# EAGLE board Protoboard-01 (EAGLE 5.06), part 1 of 2
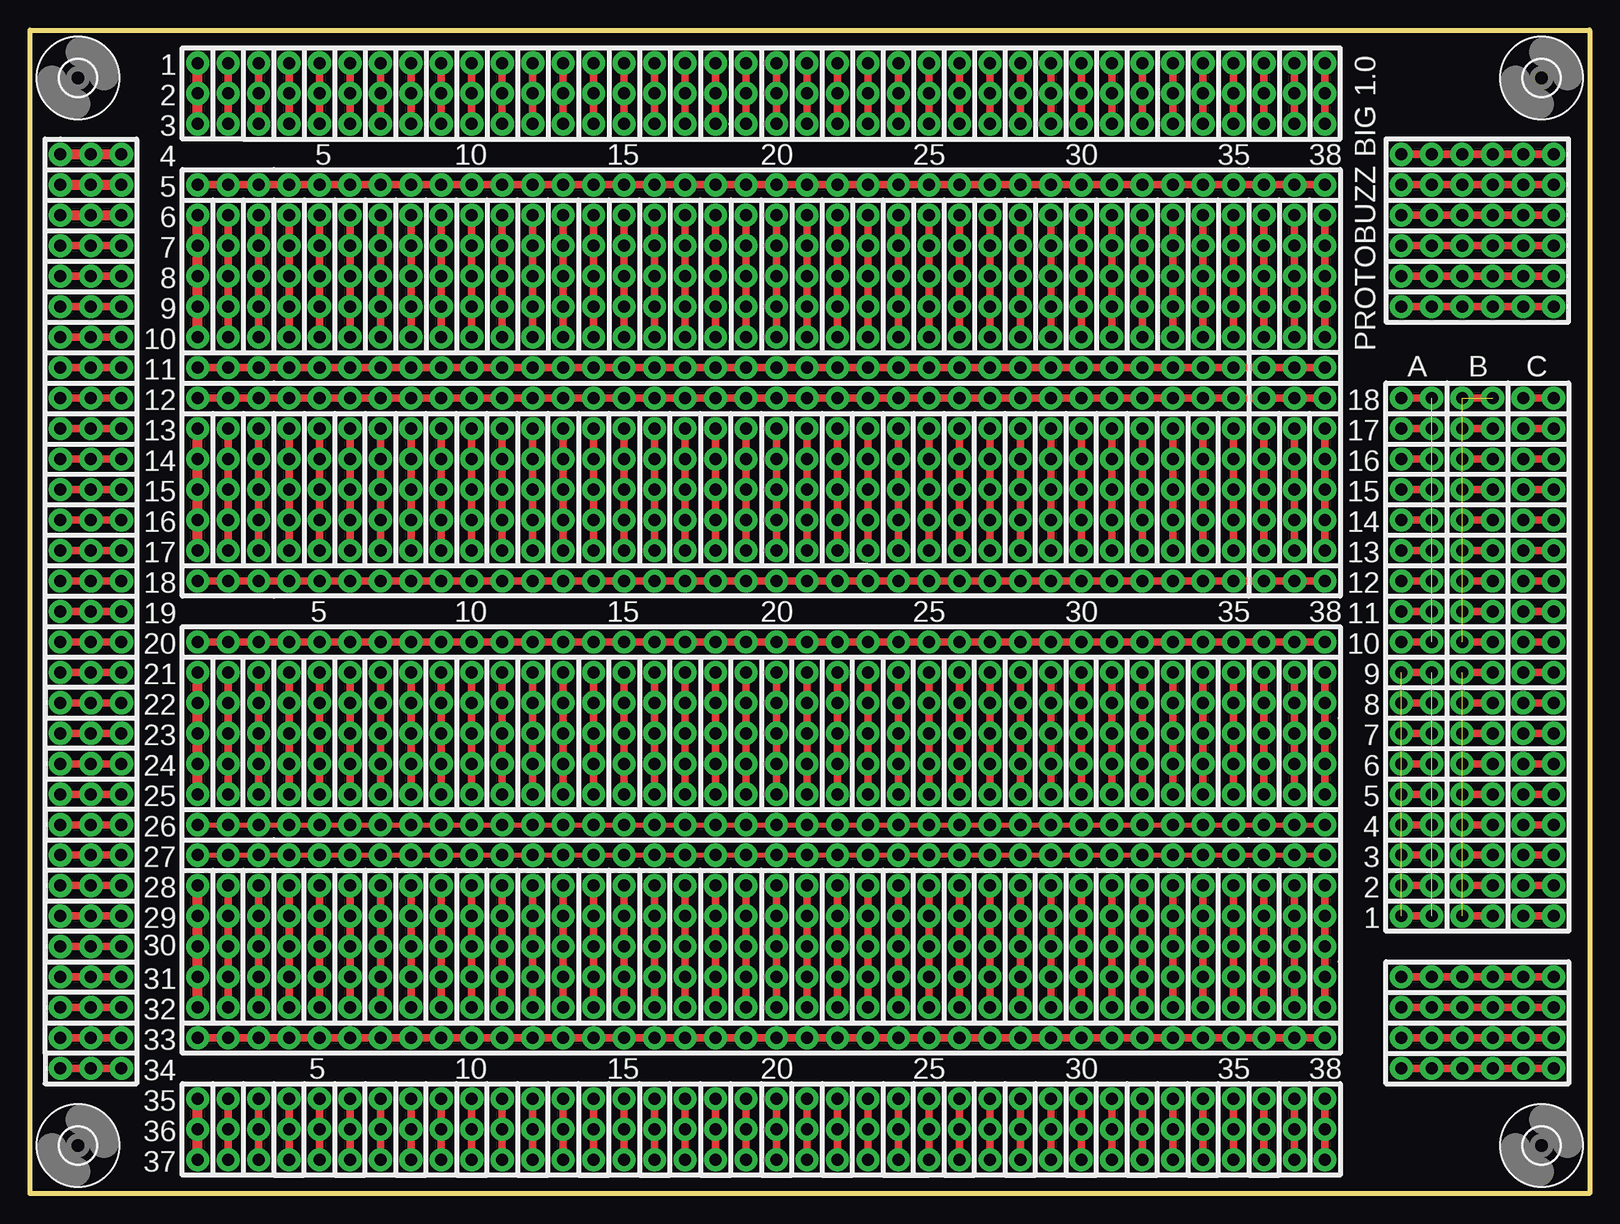
[diagram p0: board, top side]
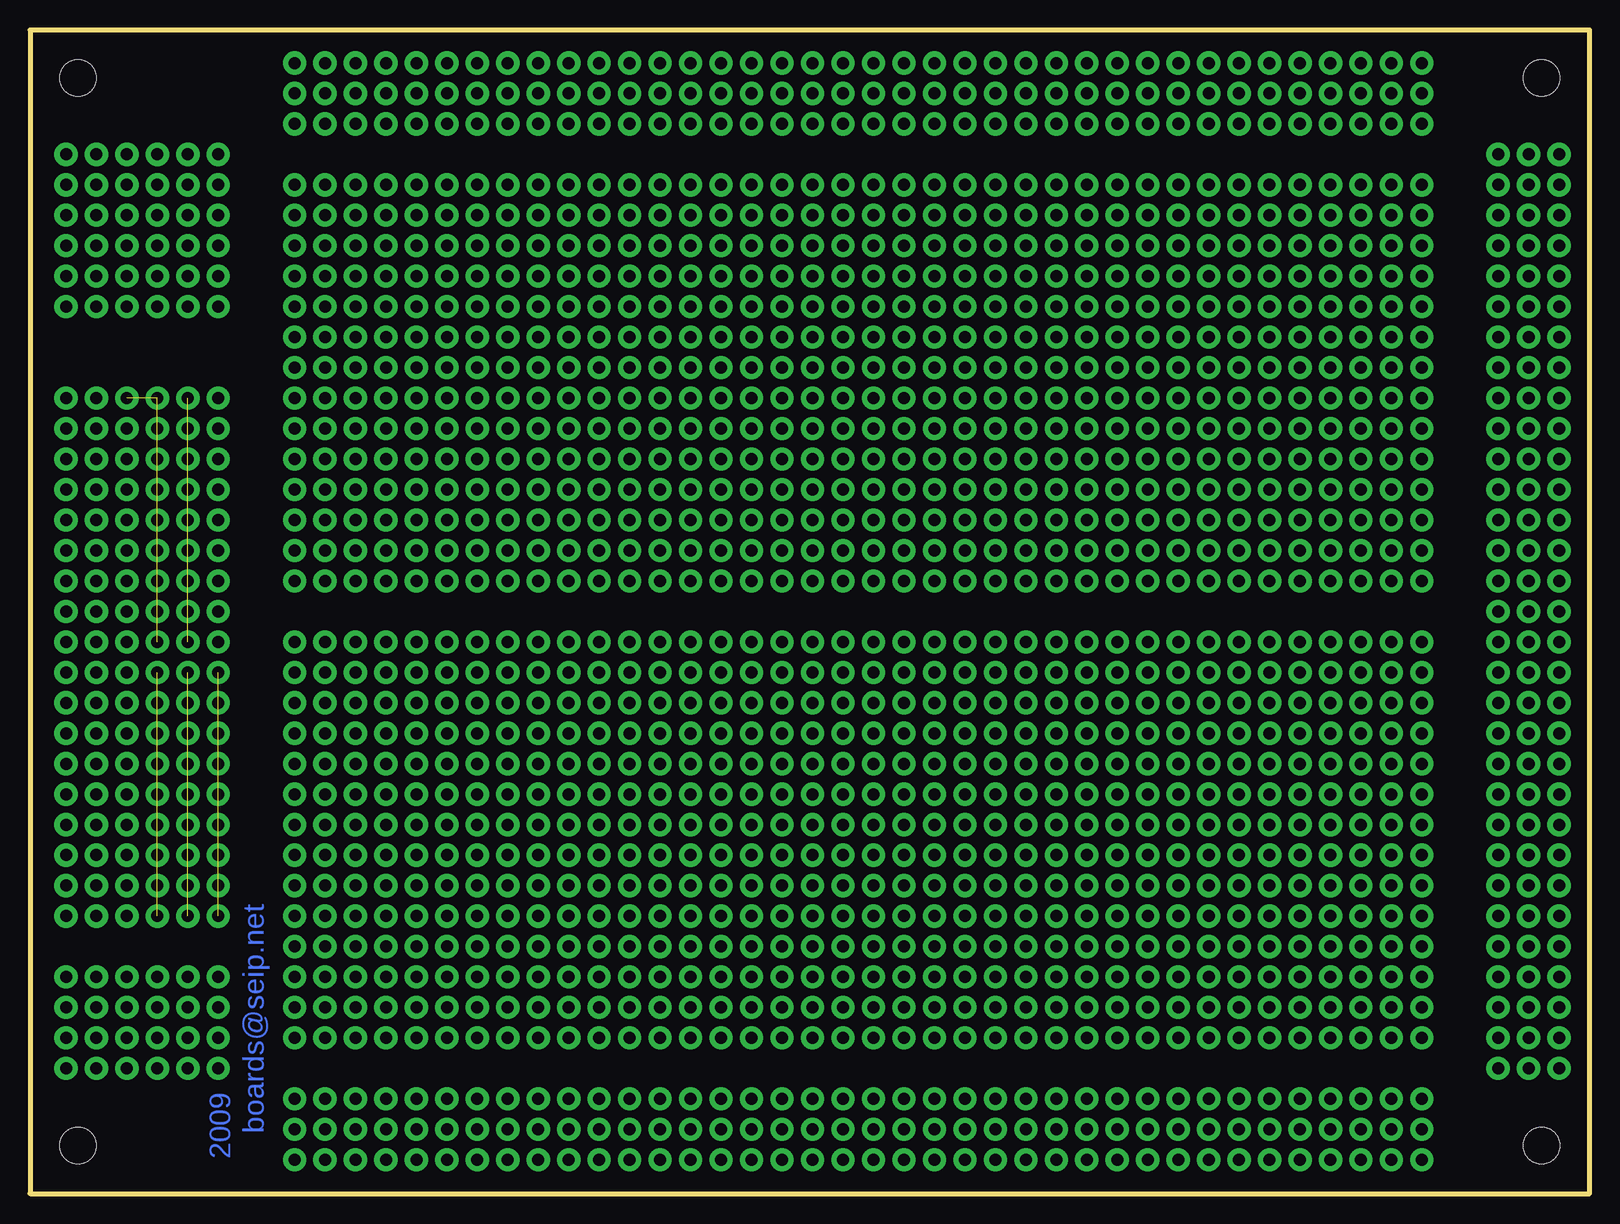
[diagram p1: board, bottom side, seen from below]

Size 130 x 97 mm. Coordinates in mm from the lower left corner, seen from the top.
Outline: 0,0 0,97 130,97 130,0 0,0
Copper layers (1*16): Top 0.035mm / dielectric 1.5mm / Bottom 0.035mm
Design rules "PCB-POOL": minimum track width 6mil, minimum drill 12mil, track to track 6mil, track to pad 6mil, pad to pad 6mil, via to via 6mil, smd to smd 6mil, copper to edge 20mil, drill to drill 8mil, minimum pad ring 8mil, minimum via ring 6mil, stop-mask expansion 3mil, vias tented up to drill 0mil, thermal gap 8mil

## Footprints (pad centres in the part's own frame; a part is rotated, then mirrored left to right if it is on the bottom)
3,0 = hole 3: 0,0

## Placement (x,y rotation side)
E$1  [3,0]  4,93 0 top
E$2  [3,0]  126,93 0 top
E$3  [3,0]  126,4 0 top
E$4  [3,0]  4,4 0 top

## Library data of the parts
E$1-E$4 = holes

## Tracks (layer width: path | path; a pad name or v marks a point on that pad's centre or on a via)
S$1  (via drill 1 pad 1.93)
  Top 0.61: v2.54,10.43 v7.62,10.43
S$2  (via drill 1 pad 1.93)
  Top 0.406: v13.97,30.75 v100.33,30.75
S$3  (via drill 1 pad 1.93)
  other vias: 5.08,10.43
S$5  (via drill 1 pad 1.93)
  Top 0.61: v114.3,10.43 v127,10.43
S$6  (via drill 1 pad 1.93)
  other vias: 116.84,10.43
S$7  (via drill 1 pad 1.93)
  other vias: 119.38,10.43
S$8  (via drill 1 pad 1.93)  (8 unrouted)
  Top 0.61: v119.38,23.13 v121.92,23.13 | v119.38,43.45 v121.92,43.45 | v119.38,40.91 v121.92,40.91 | v119.38,38.37 v121.92,38.37 | v119.38,35.83 v121.92,35.83 | v119.38,33.29 v121.92,33.29 | v119.38,30.75 v121.92,30.75 | v119.38,28.21 v121.92,28.21 | v119.38,25.67 v121.92,25.67
S$9  (via drill 1 pad 1.93)
  Top 0.406: v13.97,28.21 v100.33,28.21
S$10  (via drill 1 pad 1.93)
  Top 0.61: v114.3,86.63 v127,86.63
S$11  (via drill 1 pad 1.93)
  Top 0.61: v13.97,66.31 v100.33,66.31
S$12  (via drill 1 pad 1.93)
  Top 0.813: v13.97,53.61 v13.97,63.77
S$13  (via drill 1 pad 1.93)
  other vias: 116.84,86.63
S$14  (via drill 1 pad 1.93)
  other vias: 116.84,84.09
S$15  (via drill 1 pad 1.93)
  Top 0.61: v114.3,84.09 v127,84.09
S$16  (via drill 1 pad 1.93)
  Top 0.61: v114.3,81.55 v127,81.55
S$17  (via drill 1 pad 1.93)
  Top 0.61: v114.3,76.47 v127,76.47
S$18  (via drill 1 pad 1.93)
  other vias: 116.84,81.55
S$19  (via drill 1 pad 1.93)
  other vias: 116.84,76.47
S$20  (via drill 1 pad 1.93)
  other vias: 119.38,86.63
S$21  (via drill 1 pad 1.93)
  other vias: 119.38,84.09
S$22  (via drill 1 pad 1.93)
  other vias: 119.38,81.55
S$23  (via drill 1 pad 1.93)
  Top 0.61: v13.97,45.99 v100.33,45.99
S$24  (via drill 1 pad 1.93)
  other vias: 119.38,76.47
S$25  (via drill 1 pad 1.93)
  Top 0.61: v114.3,79.01 v127,79.01
S$26  (via drill 1 pad 1.93)
  other vias: 116.84,79.01
S$27  (via drill 1 pad 1.93)
  other vias: 105.41,18.05
S$29  (via drill 1 pad 1.93)
  other vias: 105.41,12.97
S$30  (via drill 1 pad 1.93)  (8 unrouted)
  Top 0.61: v114.3,66.31 v116.84,66.31 | v114.3,63.77 v116.84,63.77 | v114.3,61.23 v116.84,61.23 | v114.3,58.69 v116.84,58.69 | v114.3,56.15 v116.84,56.15 | v114.3,53.61 v116.84,53.61 | v114.3,51.07 v116.84,51.07 | v114.3,48.53 v116.84,48.53 | v114.3,45.99 v116.84,45.99
S$31  (via drill 1 pad 1.93)  (16 unrouted)
  Top 0.406: v114.3,43.45 v116.84,43.45
  Top 0.61: v114.3,23.13 v116.84,23.13 | v114.3,43.45 v116.84,43.45 | v114.3,40.91 v116.84,40.91 | v114.3,38.37 v116.84,38.37 | v114.3,35.83 v116.84,35.83 | v114.3,33.29 v116.84,33.29 | v114.3,30.75 v116.84,30.75 | v114.3,28.21 v116.84,28.21 | v114.3,25.67 v116.84,25.67
S$32  (via drill 1 pad 1.93)
  other vias: 119.38,79.01
S$36  (via drill 1 pad 1.93)
  Top 0.61: v114.3,73.93 v127,73.93
S$37  (via drill 1 pad 1.93)
  Top 0.61: v105.41,7.89 v105.41,2.81
S$38  (via drill 1 pad 1.93)
  other vias: 105.41,5.35
S$39  (via drill 1 pad 1.93)
  other vias: 116.84,73.93
S$40  (via drill 1 pad 1.93)
  other vias: 119.38,73.93
S$41  (via drill 1 pad 1.93)
  Top 0.61: 21.59,84.09 v107.95,84.09
S$42  (via drill 1 pad 1.93)
  other vias: 105.41,84.09
S$43  (via drill 1 pad 1.93)
  other vias: 102.87,84.09
S$44  (via drill 1 pad 1.93)
  Top 0.61: v13.97,12.97 v107.95,12.97
S$45  (via drill 1 pad 1.93)
  Top 0.61: v13.97,84.09 v100.33,84.09
S$46  (via drill 1 pad 1.93)
  other vias: 102.87,79.01
S$47  (via drill 1 pad 1.93)
  other vias: 102.87,76.47
S$48  (via drill 1 pad 1.93)
  other vias: 102.87,73.93
S$50  (via drill 1 pad 1.93)
  other vias: 107.95,18.05
S$52  (via drill 1 pad 1.93)
  Top 0.61: v107.95,7.89 v107.95,2.81
S$53  (via drill 1 pad 1.93)
  Top 0.813: v2.54,84.09 v7.62,84.09
S$54  (via drill 1 pad 1.93)
  other vias: 5.08,84.09
S$55  (via drill 1 pad 1.93)
  other vias: 107.95,5.35
S$56  (via drill 1 pad 1.93)
  Top 0.813: v2.54,81.55 v7.62,81.55
S$57  (via drill 1 pad 1.93)
  other vias: 5.08,81.55
S$59  (via drill 1 pad 1.93)
  Top 0.61: v2.54,79.01 v7.62,79.01
S$60  (via drill 1 pad 1.93)
  other vias: 5.08,79.01
S$62  (via drill 1 pad 1.93)
  Top 0.61: v102.87,81.55 v102.87,71.39
S$63  (via drill 1 pad 1.93)
  Top 0.61: v105.41,81.55 v105.41,71.39
S$66  (via drill 1 pad 1.93)
  other vias: 102.87,91.71
S$67  (via drill 1 pad 1.93)
  Top 0.61: v102.87,94.25 v102.87,89.17
S$68  (via drill 1 pad 1.93)
  Top 0.61: v105.41,94.25 v105.41,89.17
S$69  (via drill 1 pad 1.93)
  other vias: 105.41,91.71
S$71  (via drill 1 pad 1.93)
  other vias: 105.41,79.01
S$72  (via drill 1 pad 1.93)
  other vias: 105.41,76.47
S$73  (via drill 1 pad 1.93)
  other vias: 105.41,73.93
S$75  (via drill 1 pad 1.93)
  Top 0.61: v107.95,94.25 v107.95,89.17
S$76  (via drill 1 pad 1.93)
  other vias: 107.95,91.71
S$78  (via drill 1 pad 1.93)
  other vias: 107.95,79.01
S$79  (via drill 1 pad 1.93)
  other vias: 107.95,76.47
S$80  (via drill 1 pad 1.93)
  other vias: 107.95,73.93
S$82  (via drill 1 pad 1.93)
  Top 0.61: v107.95,81.55 v107.95,71.39
S$83  (via drill 1 pad 1.93)
  Top 0.61: 21.59,66.31 v107.95,66.31
S$84  (via drill 1 pad 1.93)
  Top 0.61: 21.59,45.99 v107.95,45.99
S$85  (via drill 1 pad 1.93)
  Top 0.61: 21.59,68.85 v107.95,68.85
S$86  (via drill 1 pad 1.93)
  Top 0.61: 21.59,51.07 v107.95,51.07
S$87  (via drill 1 pad 1.93)
  other vias: 102.87,66.31
S$88  (via drill 1 pad 1.93)
  other vias: 105.41,66.31
S$89  (via drill 1 pad 1.93)
  Top 0.61: v105.41,63.77 v105.41,53.61
S$90  (via drill 1 pad 1.93)
  Top 0.61: v102.87,63.77 v102.87,53.61
S$91  (via drill 1 pad 1.93)
  Top 0.813: v13.97,71.39 v13.97,81.55
S$92  (via drill 1 pad 1.93)
  other vias: 105.41,45.99
S$93  (via drill 1 pad 1.93)
  other vias: 102.87,45.99
S$94  (via drill 1 pad 1.93)
  other vias: 102.87,30.75
S$95  (via drill 1 pad 1.93)
  Top 0.61: v2.54,76.47 v7.62,76.47
S$96  (via drill 1 pad 1.93)
  other vias: 5.08,76.47
S$99  (via drill 1 pad 1.93)
  other vias: 5.08,73.93
S$100  (via drill 1 pad 1.93)
  Top 0.61: v2.54,73.93 v7.62,73.93
S$101  (via drill 1 pad 1.93)
  Top 0.61: v2.54,71.39 v7.62,71.39
S$102  (via drill 1 pad 1.93)
  other vias: 5.08,71.39
S$104  (via drill 1 pad 1.93)
  Top 0.61: v2.54,68.85 v7.62,68.85
S$105  (via drill 1 pad 1.93)
  other vias: 5.08,68.85
S$108  (via drill 1 pad 1.93)
  other vias: 5.08,66.31
S$109  (via drill 1 pad 1.93)
  Top 0.61: v2.54,66.31 v7.62,66.31
S$110  (via drill 1 pad 1.93)
  Top 0.61: v2.54,63.77 v7.62,63.77
S$111  (via drill 1 pad 1.93)
  other vias: 5.08,63.77
S$114  (via drill 1 pad 1.93)
  other vias: 5.08,61.23
S$115  (via drill 1 pad 1.93)
  Top 0.61: v2.54,61.23 v7.62,61.23
S$116  (via drill 1 pad 1.93)
  Top 0.61: v2.54,58.69 v7.62,58.69
S$117  (via drill 1 pad 1.93)
  other vias: 5.08,58.69
S$120  (via drill 1 pad 1.93)
  other vias: 5.08,56.15
S$121  (via drill 1 pad 1.93)
  Top 0.61: v2.54,56.15 v7.62,56.15
S$122  (via drill 1 pad 1.93)
  Top 0.61: v2.54,53.61 v7.62,53.61
S$123  (via drill 1 pad 1.93)
  other vias: 5.08,53.61
S$126  (via drill 1 pad 1.93)
  other vias: 5.08,51.07
S$127  (via drill 1 pad 1.93)
  Top 0.61: v2.54,51.07 v7.62,51.07
S$128  (via drill 1 pad 1.93)
  Top 0.61: v2.54,48.53 v7.62,48.53
S$129  (via drill 1 pad 1.93)
  other vias: 5.08,48.53
S$132  (via drill 1 pad 1.93)
  other vias: 5.08,45.99
S$133  (via drill 1 pad 1.93)
  Top 0.61: v2.54,45.99 v7.62,45.99
S$134  (via drill 1 pad 1.93)
  Top 0.61: v2.54,43.45 v7.62,43.45
S$135  (via drill 1 pad 1.93)
  other vias: 5.08,43.45
S$138  (via drill 1 pad 1.93)
  other vias: 5.08,40.91
S$139  (via drill 1 pad 1.93)
  Top 0.61: v2.54,40.91 v7.62,40.91
S$140  (via drill 1 pad 1.93)
  Top 0.61: v2.54,38.37 v7.62,38.37
S$141  (via drill 1 pad 1.93)
  other vias: 5.08,38.37
S$144  (via drill 1 pad 1.93)
  other vias: 5.08,35.83
S$145  (via drill 1 pad 1.93)
  Top 0.61: v2.54,35.83 v7.62,35.83
S$146  (via drill 1 pad 1.93)
  Top 0.61: v2.54,33.29 v7.62,33.29
S$147  (via drill 1 pad 1.93)
  other vias: 5.08,33.29
S$150  (via drill 1 pad 1.93)
  other vias: 5.08,30.75
S$151  (via drill 1 pad 1.93)
  Top 0.61: v2.54,30.75 v7.62,30.75
S$152  (via drill 1 pad 1.93)
  Top 0.61: v2.54,28.21 v7.62,28.21
S$153  (via drill 1 pad 1.93)
  other vias: 5.08,28.21
S$156  (via drill 1 pad 1.93)
  other vias: 5.08,25.67
S$157  (via drill 1 pad 1.93)
  Top 0.61: v2.54,25.67 v7.62,25.67
S$158  (via drill 1 pad 1.93)
  Top 0.61: v2.54,23.13 v7.62,23.13
S$159  (via drill 1 pad 1.93)
  other vias: 5.08,23.13
S$161  (via drill 1 pad 1.93)
  Top 0.61: v2.54,20.59 v7.62,20.59
S$162  (via drill 1 pad 1.93)
  other vias: 5.08,20.59
S$165  (via drill 1 pad 1.93)
  other vias: 5.08,18.05
S$166  (via drill 1 pad 1.93)
  Top 0.61: v2.54,18.05 v7.62,18.05
S$167  (via drill 1 pad 1.93)
  Top 0.61: v2.54,15.51 v7.62,15.51
S$168  (via drill 1 pad 1.93)
  other vias: 5.08,15.51
S$171  (via drill 1 pad 1.93)
  other vias: 5.08,12.97
S$172  (via drill 1 pad 1.93)
  Top 0.61: v2.54,12.97 v7.62,12.97
S$173  (via drill 1 pad 1.93)
  other vias: 105.41,30.75
S$174  (via drill 1 pad 1.93)
  other vias: 105.41,28.21
S$175  (via drill 1 pad 1.93)
  other vias: 102.87,28.21
S$176  (via drill 1 pad 1.93)
  other vias: 102.87,68.85
S$177  (via drill 1 pad 1.93)
  other vias: 102.87,61.23
S$178  (via drill 1 pad 1.93)
  other vias: 102.87,58.69
S$182  (via drill 1 pad 1.93)
  Top 0.813: v2.54,86.63 v7.62,86.63
S$183  (via drill 1 pad 1.93)
  other vias: 5.08,86.63
S$184  (via drill 1 pad 1.93)
  other vias: 102.87,56.15
S$185  (via drill 1 pad 1.93)
  Top 0.813: v13.97,89.17 v13.97,94.25
S$186  (via drill 1 pad 1.93)
  other vias: 13.97,91.71
S$188  (via drill 1 pad 1.93)
  other vias: 13.97,79.01
S$189  (via drill 1 pad 1.93)
  other vias: 13.97,76.47
S$190  (via drill 1 pad 1.93)
  other vias: 13.97,73.93
S$191  (via drill 1 pad 1.93)
  other vias: 102.87,51.07
S$192  (via drill 1 pad 1.93)
  Top 0.61: v13.97,68.85 v100.33,68.85
S$193  (via drill 1 pad 1.93)
  other vias: 13.97,61.23
S$194  (via drill 1 pad 1.93)
  other vias: 13.97,58.69
S$195  (via drill 1 pad 1.93)
  other vias: 13.97,56.15
S$196  (via drill 1 pad 1.93)
  Top 0.61: v102.87,43.45 v102.87,33.29
S$197  (via drill 1 pad 1.93)
  Top 0.61: v13.97,51.07 v100.33,51.07
S$198  (via drill 1 pad 1.93)
  Top 0.813: v13.97,33.29 v13.97,43.45
S$199  (via drill 1 pad 1.93)
  other vias: 13.97,40.91
S$200  (via drill 1 pad 1.93)
  other vias: 13.97,38.37
S$201  (via drill 1 pad 1.93)
  other vias: 13.97,35.83
S$202  (via drill 1 pad 1.93)
  other vias: 102.87,40.91
S$203  (via drill 1 pad 1.93)
  Top 0.813: v13.97,15.51 v13.97,25.67
S$204  (via drill 1 pad 1.93)
  other vias: 13.97,23.13
S$205  (via drill 1 pad 1.93)
  other vias: 13.97,20.59
S$206  (via drill 1 pad 1.93)
  other vias: 13.97,18.05
S$207  (via drill 1 pad 1.93)
  other vias: 102.87,38.37
S$208  (via drill 1 pad 1.93)
  other vias: 102.87,35.83
S$210  (via drill 1 pad 1.93)
  Top 0.61: v102.87,25.67 v102.87,15.51
S$211  (via drill 1 pad 1.93)
  other vias: 102.87,23.13
S$212  (via drill 1 pad 1.93)
  other vias: 13.97,5.35
S$213  (via drill 1 pad 1.93)
  Top 0.813: v13.97,2.81 v13.97,7.89
S$214  (via drill 1 pad 1.93)
  Top 0.61: v16.51,94.25 v16.51,89.17
S$215  (via drill 1 pad 1.93)
  other vias: 16.51,91.71
S$216  (via drill 1 pad 1.93)
  other vias: 102.87,20.59
S$217  (via drill 1 pad 1.93)
  other vias: 16.51,79.01
S$218  (via drill 1 pad 1.93)
  other vias: 16.51,76.47
S$219  (via drill 1 pad 1.93)
  other vias: 16.51,73.93
S$221  (via drill 1 pad 1.93)
  other vias: 16.51,68.85
S$222  (via drill 1 pad 1.93)
  other vias: 16.51,66.31
S$223  (via drill 1 pad 1.93)
  other vias: 19.05,66.31
S$224  (via drill 1 pad 1.93)
  other vias: 21.59,66.31
S$225  (via drill 1 pad 1.93)
  Top 0.61: v21.59,63.77 v21.59,53.61
S$226  (via drill 1 pad 1.93)
  Top 0.61: v19.05,63.77 v19.05,53.61
S$227  (via drill 1 pad 1.93)
  Top 0.61: v16.51,63.77 v16.51,53.61
S$228  (via drill 1 pad 1.93)
  other vias: 16.51,61.23
S$229  (via drill 1 pad 1.93)
  other vias: 16.51,58.69
S$230  (via drill 1 pad 1.93)
  other vias: 16.51,56.15
S$232  (via drill 1 pad 1.93)
  other vias: 16.51,51.07
S$233  (via drill 1 pad 1.93)
  other vias: 105.41,68.85
S$234  (via drill 1 pad 1.93)
  other vias: 105.41,61.23
S$235  (via drill 1 pad 1.93)
  other vias: 105.41,58.69
S$236  (via drill 1 pad 1.93)
  other vias: 21.59,45.99
S$237  (via drill 1 pad 1.93)
  other vias: 19.05,45.99
S$238  (via drill 1 pad 1.93)
  other vias: 16.51,45.99
S$239  (via drill 1 pad 1.93)
  Top 0.61: v16.51,43.45 v16.51,33.29
S$240  (via drill 1 pad 1.93)
  other vias: 16.51,40.91
S$241  (via drill 1 pad 1.93)
  other vias: 16.51,38.37
S$242  (via drill 1 pad 1.93)
  other vias: 16.51,35.83
S$244  (via drill 1 pad 1.93)
  other vias: 16.51,30.75
S$245  (via drill 1 pad 1.93)
  other vias: 19.05,30.75
S$246  (via drill 1 pad 1.93)
  other vias: 21.59,30.75
S$247  (via drill 1 pad 1.93)
  other vias: 21.59,28.21
S$248  (via drill 1 pad 1.93)
  other vias: 19.05,28.21
S$249  (via drill 1 pad 1.93)
  other vias: 16.51,28.21
S$250  (via drill 1 pad 1.93)
  Top 0.61: v16.51,25.67 v16.51,15.51
S$251  (via drill 1 pad 1.93)
  other vias: 16.51,23.13
S$252  (via drill 1 pad 1.93)
  other vias: 16.51,20.59
S$253  (via drill 1 pad 1.93)
  other vias: 16.51,18.05
S$255  (via drill 1 pad 1.93)
  other vias: 16.51,12.97
S$256  (via drill 1 pad 1.93)
  other vias: 19.05,12.97
S$257  (via drill 1 pad 1.93)
  other vias: 21.59,12.97
S$258  (via drill 1 pad 1.93)
  other vias: 21.59,84.09
S$259  (via drill 1 pad 1.93)
  other vias: 19.05,84.09
S$260  (via drill 1 pad 1.93)
  other vias: 16.51,84.09
S$261  (via drill 1 pad 1.93)
  other vias: 105.41,56.15
S$263  (via drill 1 pad 1.93)
  other vias: 105.41,51.07
S$264  (via drill 1 pad 1.93)
  Top 0.61: v16.51,7.89 v16.51,2.81
S$265  (via drill 1 pad 1.93)
  other vias: 16.51,5.35
S$266  (via drill 1 pad 1.93)
  other vias: 19.05,79.01
S$267  (via drill 1 pad 1.93)
  other vias: 19.05,76.47
S$268  (via drill 1 pad 1.93)
  other vias: 19.05,73.93
S$270  (via drill 1 pad 1.93)
  other vias: 19.05,68.85
S$271  (via drill 1 pad 1.93)
  other vias: 19.05,61.23
S$272  (via drill 1 pad 1.93)
  other vias: 19.05,58.69
S$273  (via drill 1 pad 1.93)
  other vias: 19.05,56.15
S$275  (via drill 1 pad 1.93)
  other vias: 19.05,51.07
S$276  (via drill 1 pad 1.93)
  Top 0.61: v19.05,43.45 v19.05,33.29
S$277  (via drill 1 pad 1.93)
  other vias: 19.05,40.91
S$278  (via drill 1 pad 1.93)
  other vias: 19.05,38.37
S$279  (via drill 1 pad 1.93)
  other vias: 19.05,35.83
S$281  (via drill 1 pad 1.93)
  Top 0.61: v19.05,25.67 v19.05,15.51
S$282  (via drill 1 pad 1.93)
  other vias: 19.05,23.13
S$283  (via drill 1 pad 1.93)
  other vias: 19.05,20.59
S$284  (via drill 1 pad 1.93)
  other vias: 19.05,18.05
S$286  (via drill 1 pad 1.93)
  Top 0.61: v105.41,43.45 v105.41,33.29
S$287  (via drill 1 pad 1.93)
  other vias: 105.41,40.91
S$288  (via drill 1 pad 1.93)
  other vias: 105.41,38.37
S$289  (via drill 1 pad 1.93)
  Top 0.61: v19.05,7.89 v19.05,2.81
S$290  (via drill 1 pad 1.93)
  other vias: 19.05,5.35
S$292  (via drill 1 pad 1.93)
  other vias: 105.41,35.83
S$293  (via drill 1 pad 1.93)
  Top 0.61: v16.51,81.55 v16.51,71.39
S$294  (via drill 1 pad 1.93)
  Top 0.61: v19.05,81.55 v19.05,71.39
S$295  (via drill 1 pad 1.93)
  Top 0.61: v21.59,81.55 v21.59,71.39
S$297  (via drill 1 pad 1.93)
  other vias: 19.05,91.71
S$298  (via drill 1 pad 1.93)
  Top 0.61: v19.05,94.25 v19.05,89.17
S$299  (via drill 1 pad 1.93)
  Top 0.61: v21.59,94.25 v21.59,89.17
S$300  (via drill 1 pad 1.93)
  other vias: 21.59,91.71
S$302  (via drill 1 pad 1.93)
  other vias: 21.59,79.01
S$303  (via drill 1 pad 1.93)
  other vias: 21.59,76.47
S$304  (via drill 1 pad 1.93)
  other vias: 21.59,73.93
S$306  (via drill 1 pad 1.93)
  other vias: 21.59,68.85
S$307  (via drill 1 pad 1.93)
  other vias: 21.59,61.23
S$308  (via drill 1 pad 1.93)
  other vias: 21.59,58.69
S$309  (via drill 1 pad 1.93)
  other vias: 21.59,56.15
S$311  (via drill 1 pad 1.93)
  other vias: 21.59,51.07
S$312  (via drill 1 pad 1.93)
  Top 0.61: v21.59,43.45 v21.59,33.29
S$313  (via drill 1 pad 1.93)
  other vias: 21.59,40.91
S$314  (via drill 1 pad 1.93)
  other vias: 21.59,38.37
S$315  (via drill 1 pad 1.93)
  other vias: 21.59,35.83
S$317  (via drill 1 pad 1.93)
  Top 0.61: v21.59,25.67 v21.59,15.51
S$318  (via drill 1 pad 1.93)
  other vias: 21.59,23.13
S$319  (via drill 1 pad 1.93)
  other vias: 21.59,20.59
S$320  (via drill 1 pad 1.93)
  other vias: 21.59,18.05
S$323  (via drill 1 pad 1.93)
  Top 0.61: v105.41,25.67 v105.41,15.51
S$324  (via drill 1 pad 1.93)
  other vias: 105.41,23.13
S$325  (via drill 1 pad 1.93)
  Top 0.61: v21.59,7.89 v21.59,2.81
S$326  (via drill 1 pad 1.93)
  other vias: 21.59,5.35
S$328  (via drill 1 pad 1.93)
  Top 0.61: v24.13,94.25 v24.13,89.17
S$329  (via drill 1 pad 1.93)
  other vias: 24.13,91.71
S$331  (via drill 1 pad 1.93)
  other vias: 24.13,79.01
S$332  (via drill 1 pad 1.93)
  other vias: 24.13,76.47
S$333  (via drill 1 pad 1.93)
  other vias: 24.13,73.93
S$335  (via drill 1 pad 1.93)
  other vias: 24.13,68.85
S$336  (via drill 1 pad 1.93)
  other vias: 24.13,66.31
S$337  (via drill 1 pad 1.93)
  other vias: 26.67,66.31
S$338  (via drill 1 pad 1.93)
  other vias: 29.21,66.31
S$339  (via drill 1 pad 1.93)
  Top 0.61: v29.21,63.77 v29.21,53.61
S$340  (via drill 1 pad 1.93)
  Top 0.61: v26.67,63.77 v26.67,53.61
S$341  (via drill 1 pad 1.93)
  Top 0.61: v24.13,63.77 v24.13,53.61
S$342  (via drill 1 pad 1.93)
  other vias: 24.13,61.23
S$343  (via drill 1 pad 1.93)
  other vias: 24.13,58.69
S$344  (via drill 1 pad 1.93)
  other vias: 24.13,56.15
S$346  (via drill 1 pad 1.93)
  other vias: 24.13,51.07
S$347  (via drill 1 pad 1.93)
  other vias: 105.41,20.59
S$348  (via drill 1 pad 1.93)
  Top 0.61: v107.95,63.77 v107.95,53.61
S$349  (via drill 1 pad 1.93)
  other vias: 107.95,61.23
S$350  (via drill 1 pad 1.93)
  other vias: 29.21,45.99
S$351  (via drill 1 pad 1.93)
  other vias: 26.67,45.99
S$352  (via drill 1 pad 1.93)
  other vias: 24.13,45.99
S$353  (via drill 1 pad 1.93)
  Top 0.61: v24.13,43.45 v24.13,33.29
S$354  (via drill 1 pad 1.93)
  other vias: 24.13,40.91
S$355  (via drill 1 pad 1.93)
  other vias: 24.13,38.37
S$356  (via drill 1 pad 1.93)
  other vias: 24.13,35.83
S$358  (via drill 1 pad 1.93)
  other vias: 24.13,30.75
S$359  (via drill 1 pad 1.93)
  other vias: 26.67,30.75
S$360  (via drill 1 pad 1.93)
  other vias: 29.21,30.75
S$361  (via drill 1 pad 1.93)
  other vias: 29.21,28.21
S$362  (via drill 1 pad 1.93)
  other vias: 26.67,28.21
S$363  (via drill 1 pad 1.93)
  other vias: 24.13,28.21
S$364  (via drill 1 pad 1.93)
  Top 0.61: v24.13,25.67 v24.13,15.51
S$365  (via drill 1 pad 1.93)
  other vias: 24.13,23.13
S$366  (via drill 1 pad 1.93)
  other vias: 24.13,20.59
S$367  (via drill 1 pad 1.93)
  other vias: 24.13,18.05
S$369  (via drill 1 pad 1.93)
  other vias: 24.13,12.97
S$370  (via drill 1 pad 1.93)
  other vias: 26.67,12.97
S$371  (via drill 1 pad 1.93)
  other vias: 29.21,12.97
S$372  (via drill 1 pad 1.93)
  other vias: 29.21,84.09
S$373  (via drill 1 pad 1.93)
  other vias: 26.67,84.09
S$374  (via drill 1 pad 1.93)
  other vias: 24.13,84.09
S$375  (via drill 1 pad 1.93)
  other vias: 107.95,58.69
S$376  (via drill 1 pad 1.93)
  other vias: 107.95,56.15
S$378  (via drill 1 pad 1.93)
  Top 0.61: v24.13,7.89 v24.13,2.81
S$379  (via drill 1 pad 1.93)
  other vias: 24.13,5.35
S$380  (via drill 1 pad 1.93)
  other vias: 26.67,79.01
S$381  (via drill 1 pad 1.93)
  other vias: 26.67,76.47
S$382  (via drill 1 pad 1.93)
  other vias: 26.67,73.93
S$384  (via drill 1 pad 1.93)
  other vias: 26.67,68.85
S$385  (via drill 1 pad 1.93)
  other vias: 26.67,61.23
S$386  (via drill 1 pad 1.93)
  other vias: 26.67,58.69
S$387  (via drill 1 pad 1.93)
  other vias: 26.67,56.15
S$389  (via drill 1 pad 1.93)
  other vias: 26.67,51.07
S$390  (via drill 1 pad 1.93)
  Top 0.61: v26.67,43.45 v26.67,33.29
S$391  (via drill 1 pad 1.93)
  other vias: 26.67,40.91
S$392  (via drill 1 pad 1.93)
  other vias: 26.67,38.37
S$393  (via drill 1 pad 1.93)
  other vias: 26.67,35.83
S$395  (via drill 1 pad 1.93)
  Top 0.61: v26.67,25.67 v26.67,15.51
S$396  (via drill 1 pad 1.93)
  other vias: 26.67,23.13
S$397  (via drill 1 pad 1.93)
  other vias: 26.67,20.59
S$398  (via drill 1 pad 1.93)
  other vias: 26.67,18.05
S$400  (via drill 1 pad 1.93)
  Top 0.61: v107.95,43.45 v107.95,33.29
S$401  (via drill 1 pad 1.93)
  other vias: 107.95,40.91
S$402  (via drill 1 pad 1.93)
  other vias: 107.95,38.37
S$403  (via drill 1 pad 1.93)
  Top 0.61: v26.67,7.89 v26.67,2.81
S$404  (via drill 1 pad 1.93)
  other vias: 26.67,5.35
S$407  (via drill 1 pad 1.93)
  Top 0.61: v24.13,81.55 v24.13,71.39
S$408  (via drill 1 pad 1.93)
  Top 0.61: v26.67,81.55 v26.67,71.39
S$409  (via drill 1 pad 1.93)
  Top 0.61: v29.21,81.55 v29.21,71.39
S$411  (via drill 1 pad 1.93)
  other vias: 26.67,91.71
S$412  (via drill 1 pad 1.93)
  Top 0.61: v26.67,94.25 v26.67,89.17
S$413  (via drill 1 pad 1.93)
  Top 0.61: v29.21,94.25 v29.21,89.17
S$414  (via drill 1 pad 1.93)
  other vias: 29.21,91.71
S$416  (via drill 1 pad 1.93)
  other vias: 29.21,79.01
S$417  (via drill 1 pad 1.93)
  other vias: 29.21,76.47
S$418  (via drill 1 pad 1.93)
  other vias: 29.21,73.93
S$420  (via drill 1 pad 1.93)
  other vias: 29.21,68.85
S$421  (via drill 1 pad 1.93)
  other vias: 29.21,61.23
S$422  (via drill 1 pad 1.93)
  other vias: 29.21,58.69
S$423  (via drill 1 pad 1.93)
  other vias: 29.21,56.15
S$425  (via drill 1 pad 1.93)
  other vias: 29.21,51.07
S$426  (via drill 1 pad 1.93)
  Top 0.61: v29.21,43.45 v29.21,33.29
S$427  (via drill 1 pad 1.93)
  other vias: 29.21,40.91
S$428  (via drill 1 pad 1.93)
  other vias: 29.21,38.37
S$429  (via drill 1 pad 1.93)
  other vias: 29.21,35.83
S$431  (via drill 1 pad 1.93)
  Top 0.61: v29.21,25.67 v29.21,15.51
S$432  (via drill 1 pad 1.93)
  other vias: 29.21,23.13
S$433  (via drill 1 pad 1.93)
  other vias: 29.21,20.59
S$434  (via drill 1 pad 1.93)
  other vias: 29.21,18.05
S$436  (via drill 1 pad 1.93)
  other vias: 107.95,35.83
S$438  (via drill 1 pad 1.93)
  Top 0.61: v107.95,25.67 v107.95,15.51
S$439  (via drill 1 pad 1.93)
  Top 0.61: v29.21,7.89 v29.21,2.81
S$440  (via drill 1 pad 1.93)
  other vias: 29.21,5.35
S$442  (via drill 1 pad 1.93)
  Top 0.61: v31.75,94.25 v31.75,89.17
S$443  (via drill 1 pad 1.93)
  other vias: 31.75,91.71
S$445  (via drill 1 pad 1.93)
  other vias: 31.75,79.01
S$446  (via drill 1 pad 1.93)
  other vias: 31.75,76.47
S$447  (via drill 1 pad 1.93)
  other vias: 31.75,73.93
S$449  (via drill 1 pad 1.93)
  other vias: 31.75,68.85
S$450  (via drill 1 pad 1.93)
  other vias: 31.75,66.31
S$451  (via drill 1 pad 1.93)
  other vias: 34.29,66.31
S$452  (via drill 1 pad 1.93)
  other vias: 36.83,66.31
S$453  (via drill 1 pad 1.93)
  Top 0.61: v36.83,63.77 v36.83,53.61
S$454  (via drill 1 pad 1.93)
  Top 0.61: v34.29,63.77 v34.29,53.61
S$455  (via drill 1 pad 1.93)
  Top 0.61: v31.75,63.77 v31.75,53.61
S$456  (via drill 1 pad 1.93)
  other vias: 31.75,61.23
S$457  (via drill 1 pad 1.93)
  other vias: 31.75,58.69
S$458  (via drill 1 pad 1.93)
  other vias: 31.75,56.15
S$460  (via drill 1 pad 1.93)
  other vias: 31.75,51.07
S$461  (via drill 1 pad 1.93)
  other vias: 107.95,23.13
S$462  (via drill 1 pad 1.93)
  other vias: 107.95,20.59
S$463  (via drill 1 pad 1.93)
  Top 0.406: 21.59,30.75 v107.95,30.75
S$464  (via drill 1 pad 1.93)
  other vias: 36.83,45.99
S$465  (via drill 1 pad 1.93)
  other vias: 34.29,45.99
S$466  (via drill 1 pad 1.93)
  other vias: 31.75,45.99
S$467  (via drill 1 pad 1.93)
  Top 0.61: v31.75,43.45 v31.75,33.29
S$468  (via drill 1 pad 1.93)
  other vias: 31.75,40.91
S$469  (via drill 1 pad 1.93)
  other vias: 31.75,38.37
S$470  (via drill 1 pad 1.93)
  other vias: 31.75,35.83
S$472  (via drill 1 pad 1.93)
  other vias: 31.75,30.75
S$473  (via drill 1 pad 1.93)
  other vias: 34.29,30.75
S$474  (via drill 1 pad 1.93)
  other vias: 36.83,30.75
S$475  (via drill 1 pad 1.93)
  other vias: 36.83,28.21
S$476  (via drill 1 pad 1.93)
  other vias: 34.29,28.21
S$477  (via drill 1 pad 1.93)
  other vias: 31.75,28.21
S$478  (via drill 1 pad 1.93)
  Top 0.61: v31.75,25.67 v31.75,15.51
S$479  (via drill 1 pad 1.93)
  other vias: 31.75,23.13
S$480  (via drill 1 pad 1.93)
  other vias: 31.75,20.59
S$481  (via drill 1 pad 1.93)
  other vias: 31.75,18.05
S$483  (via drill 1 pad 1.93)
  other vias: 31.75,12.97
S$484  (via drill 1 pad 1.93)
  other vias: 34.29,12.97
S$485  (via drill 1 pad 1.93)
  other vias: 36.83,12.97
S$486  (via drill 1 pad 1.93)
  other vias: 36.83,84.09
S$487  (via drill 1 pad 1.93)
  other vias: 34.29,84.09
S$488  (via drill 1 pad 1.93)
  other vias: 31.75,84.09
S$489  (via drill 1 pad 1.93)
  Top 0.406: 21.59,28.21 v107.95,28.21
S$490  (via drill 1 pad 1.93)
  other vias: 121.92,86.63
S$491  (via drill 1 pad 1.93)
  other vias: 124.46,86.63
S$492  (via drill 1 pad 1.93)
  Top 0.61: v31.75,7.89 v31.75,2.81
S$493  (via drill 1 pad 1.93)
  other vias: 31.75,5.35
S$494  (via drill 1 pad 1.93)
  other vias: 34.29,79.01
S$495  (via drill 1 pad 1.93)
  other vias: 34.29,76.47
S$496  (via drill 1 pad 1.93)
  other vias: 34.29,73.93
S$498  (via drill 1 pad 1.93)
  other vias: 34.29,68.85
S$499  (via drill 1 pad 1.93)
  other vias: 34.29,61.23
S$500  (via drill 1 pad 1.93)
  other vias: 34.29,58.69
S$501  (via drill 1 pad 1.93)
  other vias: 34.29,56.15
S$503  (via drill 1 pad 1.93)
  other vias: 34.29,51.07
S$504  (via drill 1 pad 1.93)
  Top 0.61: v34.29,43.45 v34.29,33.29
S$505  (via drill 1 pad 1.93)
  other vias: 34.29,40.91
S$506  (via drill 1 pad 1.93)
  other vias: 34.29,38.37
S$507  (via drill 1 pad 1.93)
  other vias: 34.29,35.83
S$509  (via drill 1 pad 1.93)
  Top 0.61: v34.29,25.67 v34.29,15.51
S$510  (via drill 1 pad 1.93)
  other vias: 34.29,23.13
S$511  (via drill 1 pad 1.93)
  other vias: 34.29,20.59
S$512  (via drill 1 pad 1.93)
  other vias: 34.29,18.05
S$514  (via drill 1 pad 1.93)
  other vias: 124.46,84.09
S$515  (via drill 1 pad 1.93)
  other vias: 121.92,84.09
S$516  (via drill 1 pad 1.93)
  other vias: 121.92,81.55
S$517  (via drill 1 pad 1.93)
  Top 0.61: v34.29,7.89 v34.29,2.81
S$518  (via drill 1 pad 1.93)
  other vias: 34.29,5.35
S$521  (via drill 1 pad 1.93)
  Top 0.61: v31.75,81.55 v31.75,71.39
S$522  (via drill 1 pad 1.93)
  Top 0.61: v34.29,81.55 v34.29,71.39
S$523  (via drill 1 pad 1.93)
  Top 0.61: v36.83,81.55 v36.83,71.39
S$525  (via drill 1 pad 1.93)
  other vias: 34.29,91.71
S$526  (via drill 1 pad 1.93)
  Top 0.61: v34.29,94.25 v34.29,89.17
S$527  (via drill 1 pad 1.93)
  Top 0.61: v36.83,94.25 v36.83,89.17
S$528  (via drill 1 pad 1.93)
  other vias: 36.83,91.71
S$530  (via drill 1 pad 1.93)
  other vias: 36.83,79.01
S$531  (via drill 1 pad 1.93)
  other vias: 36.83,76.47
S$532  (via drill 1 pad 1.93)
  other vias: 36.83,73.93
S$534  (via drill 1 pad 1.93)
  other vias: 36.83,68.85
S$535  (via drill 1 pad 1.93)
  other vias: 36.83,61.23
S$536  (via drill 1 pad 1.93)
  other vias: 36.83,58.69
S$537  (via drill 1 pad 1.93)
  other vias: 36.83,56.15
S$539  (via drill 1 pad 1.93)
  other vias: 36.83,51.07
S$540  (via drill 1 pad 1.93)
  Top 0.61: v36.83,43.45 v36.83,33.29
S$541  (via drill 1 pad 1.93)
  other vias: 36.83,40.91
S$542  (via drill 1 pad 1.93)
  other vias: 36.83,38.37
S$543  (via drill 1 pad 1.93)
  other vias: 36.83,35.83
S$545  (via drill 1 pad 1.93)
  Top 0.61: v36.83,25.67 v36.83,15.51
S$546  (via drill 1 pad 1.93)
  other vias: 36.83,23.13
S$547  (via drill 1 pad 1.93)
  other vias: 36.83,20.59
S$548  (via drill 1 pad 1.93)
  other vias: 36.83,18.05
S$550  (via drill 1 pad 1.93)
  other vias: 121.92,76.47
S$551  (via drill 1 pad 1.93)
  other vias: 124.46,81.55
S$552  (via drill 1 pad 1.93)
  other vias: 124.46,76.47
S$553  (via drill 1 pad 1.93)
  Top 0.61: v36.83,7.89 v36.83,2.81
S$554  (via drill 1 pad 1.93)
  other vias: 36.83,5.35
S$556  (via drill 1 pad 1.93)
  Top 0.61: v39.37,94.25 v39.37,89.17
S$557  (via drill 1 pad 1.93)
  other vias: 39.37,91.71
S$559  (via drill 1 pad 1.93)
  other vias: 39.37,79.01
S$560  (via drill 1 pad 1.93)
  other vias: 39.37,76.47
S$561  (via drill 1 pad 1.93)
  other vias: 39.37,73.93
S$563  (via drill 1 pad 1.93)
  other vias: 39.37,68.85
S$564  (via drill 1 pad 1.93)
  other vias: 39.37,66.31
S$565  (via drill 1 pad 1.93)
  other vias: 41.91,66.31
S$566  (via drill 1 pad 1.93)
  other vias: 44.45,66.31
S$567  (via drill 1 pad 1.93)
  Top 0.61: v44.45,63.77 v44.45,53.61
S$568  (via drill 1 pad 1.93)
  Top 0.61: v41.91,63.77 v41.91,53.61
S$569  (via drill 1 pad 1.93)
  Top 0.61: v39.37,63.77 v39.37,53.61
S$570  (via drill 1 pad 1.93)
  other vias: 39.37,61.23
S$571  (via drill 1 pad 1.93)
  other vias: 39.37,58.69
S$572  (via drill 1 pad 1.93)
  other vias: 39.37,56.15
S$574  (via drill 1 pad 1.93)
  other vias: 39.37,51.07
S$578  (via drill 1 pad 1.93)
  other vias: 44.45,45.99
S$579  (via drill 1 pad 1.93)
  other vias: 41.91,45.99
S$580  (via drill 1 pad 1.93)
  other vias: 39.37,45.99
S$581  (via drill 1 pad 1.93)
  Top 0.61: v39.37,43.45 v39.37,33.29
S$582  (via drill 1 pad 1.93)
  other vias: 39.37,40.91
S$583  (via drill 1 pad 1.93)
  other vias: 39.37,38.37
S$584  (via drill 1 pad 1.93)
  other vias: 39.37,35.83
S$586  (via drill 1 pad 1.93)
  other vias: 39.37,30.75
S$587  (via drill 1 pad 1.93)
  other vias: 41.91,30.75
S$588  (via drill 1 pad 1.93)
  other vias: 44.45,30.75
S$589  (via drill 1 pad 1.93)
  other vias: 44.45,28.21
S$590  (via drill 1 pad 1.93)
  other vias: 41.91,28.21
S$591  (via drill 1 pad 1.93)
  other vias: 39.37,28.21
S$592  (via drill 1 pad 1.93)
  Top 0.61: v39.37,25.67 v39.37,15.51
S$593  (via drill 1 pad 1.93)
  other vias: 39.37,23.13
S$594  (via drill 1 pad 1.93)
  other vias: 39.37,20.59
S$595  (via drill 1 pad 1.93)
  other vias: 39.37,18.05
S$597  (via drill 1 pad 1.93)
  other vias: 39.37,12.97
S$598  (via drill 1 pad 1.93)
  other vias: 41.91,12.97
S$599  (via drill 1 pad 1.93)
  other vias: 44.45,12.97
S$600  (via drill 1 pad 1.93)
  other vias: 44.45,84.09
S$601  (via drill 1 pad 1.93)
  other vias: 41.91,84.09
S$602  (via drill 1 pad 1.93)
  other vias: 39.37,84.09
S$604  (via drill 1 pad 1.93)
  other vias: 121.92,79.01
S$605  (via drill 1 pad 1.93)
  other vias: 124.46,79.01
S$606  (via drill 1 pad 1.93)
  Top 0.61: v39.37,7.89 v39.37,2.81
S$607  (via drill 1 pad 1.93)
  other vias: 39.37,5.35
S$608  (via drill 1 pad 1.93)
  other vias: 41.91,79.01
S$609  (via drill 1 pad 1.93)
  other vias: 41.91,76.47
S$610  (via drill 1 pad 1.93)
  other vias: 41.91,73.93
S$612  (via drill 1 pad 1.93)
  other vias: 41.91,68.85
S$613  (via drill 1 pad 1.93)
  other vias: 41.91,61.23
S$614  (via drill 1 pad 1.93)
  other vias: 41.91,58.69
S$615  (via drill 1 pad 1.93)
  other vias: 41.91,56.15
S$617  (via drill 1 pad 1.93)
  other vias: 41.91,51.07
S$618  (via drill 1 pad 1.93)
  Top 0.61: v41.91,43.45 v41.91,33.29
S$619  (via drill 1 pad 1.93)
  other vias: 41.91,40.91
S$620  (via drill 1 pad 1.93)
  other vias: 41.91,38.37
S$621  (via drill 1 pad 1.93)
  other vias: 41.91,35.83
S$623  (via drill 1 pad 1.93)
  Top 0.61: v41.91,25.67 v41.91,15.51
S$624  (via drill 1 pad 1.93)
  other vias: 41.91,23.13
S$625  (via drill 1 pad 1.93)
  other vias: 41.91,20.59
S$626  (via drill 1 pad 1.93)
  other vias: 41.91,18.05
S$631  (via drill 1 pad 1.93)
  Top 0.61: v41.91,7.89 v41.91,2.81
S$632  (via drill 1 pad 1.93)
  other vias: 41.91,5.35
S$635  (via drill 1 pad 1.93)
  Top 0.61: v39.37,81.55 v39.37,71.39
S$636  (via drill 1 pad 1.93)
  Top 0.61: v41.91,81.55 v41.91,71.39
S$637  (via drill 1 pad 1.93)
  Top 0.61: v44.45,81.55 44.45,72.66
S$639  (via drill 1 pad 1.93)
  other vias: 41.91,91.71
S$640  (via drill 1 pad 1.93)
  Top 0.61: v41.91,94.25 v41.91,89.17
S$641  (via drill 1 pad 1.93)
  Top 0.61: v44.45,94.25 v44.45,89.17
S$642  (via drill 1 pad 1.93)
  other vias: 44.45,91.71
S$644  (via drill 1 pad 1.93)
  other vias: 44.45,79.01
S$645  (via drill 1 pad 1.93)
  other vias: 44.45,76.47
S$646  (via drill 1 pad 1.93)
  Top 0.61: v44.45,73.93 v44.45,71.39
S$648  (via drill 1 pad 1.93)
  other vias: 44.45,68.85
S$649  (via drill 1 pad 1.93)
  other vias: 44.45,61.23
S$650  (via drill 1 pad 1.93)
  other vias: 44.45,58.69
S$651  (via drill 1 pad 1.93)
  other vias: 44.45,56.15
S$653  (via drill 1 pad 1.93)
  other vias: 44.45,51.07
S$654  (via drill 1 pad 1.93)
  Top 0.61: v44.45,43.45 v44.45,33.29
S$655  (via drill 1 pad 1.93)
  other vias: 44.45,40.91
S$656  (via drill 1 pad 1.93)
  other vias: 44.45,38.37
S$657  (via drill 1 pad 1.93)
  other vias: 44.45,35.83
S$659  (via drill 1 pad 1.93)
  Top 0.61: v44.45,25.67 v44.45,15.51
S$660  (via drill 1 pad 1.93)
  other vias: 44.45,23.13
S$661  (via drill 1 pad 1.93)
  other vias: 44.45,20.59
S$662  (via drill 1 pad 1.93)
  other vias: 44.45,18.05
S$665  (via drill 1 pad 1.93)
  other vias: 121.92,73.93
S$666  (via drill 1 pad 1.93)
  other vias: 124.46,73.93
S$667  (via drill 1 pad 1.93)
  Top 0.61: v44.45,7.89 v44.45,2.81
S$668  (via drill 1 pad 1.93)
  other vias: 44.45,5.35
S$670  (via drill 1 pad 1.93)
  Top 0.61: v46.99,94.25 46.99,90.44
S$671  (via drill 1 pad 1.93)
  Top 0.61: v46.99,91.71 v46.99,89.17
S$673  (via drill 1 pad 1.93)
  other vias: 46.99,79.01
S$674  (via drill 1 pad 1.93)
  other vias: 46.99,76.47
S$675  (via drill 1 pad 1.93)
  other vias: 46.99,73.93
S$677  (via drill 1 pad 1.93)
  other vias: 46.99,68.85
S$678  (via drill 1 pad 1.93)
  other vias: 46.99,66.31
S$679  (via drill 1 pad 1.93)
  other vias: 49.53,66.31
S$680  (via drill 1 pad 1.93)
  other vias: 52.07,66.31
S$681  (via drill 1 pad 1.93)
  Top 0.61: v52.07,63.77 v52.07,53.61
S$682  (via drill 1 pad 1.93)
  Top 0.61: v49.53,63.77 v49.53,53.61
S$683  (via drill 1 pad 1.93)
  Top 0.61: v46.99,63.77 v46.99,53.61
S$684  (via drill 1 pad 1.93)
  other vias: 46.99,61.23
S$685  (via drill 1 pad 1.93)
  other vias: 46.99,58.69
S$686  (via drill 1 pad 1.93)
  other vias: 46.99,56.15
S$688  (via drill 1 pad 1.93)
  other vias: 46.99,51.07
S$690  (via drill 1 pad 1.93)
  other vias: 121.92,18.05
S$691  (via drill 1 pad 1.93)
  other vias: 124.46,18.05
S$692  (via drill 1 pad 1.93)
  other vias: 52.07,45.99
S$693  (via drill 1 pad 1.93)
  other vias: 49.53,45.99
S$694  (via drill 1 pad 1.93)
  other vias: 46.99,45.99
S$695  (via drill 1 pad 1.93)
  Top 0.61: v46.99,43.45 v46.99,33.29
S$696  (via drill 1 pad 1.93)
  other vias: 46.99,40.91
S$697  (via drill 1 pad 1.93)
  other vias: 46.99,38.37
S$698  (via drill 1 pad 1.93)
  other vias: 46.99,35.83
S$700  (via drill 1 pad 1.93)
  other vias: 46.99,30.75
S$701  (via drill 1 pad 1.93)
  other vias: 49.53,30.75
S$702  (via drill 1 pad 1.93)
  other vias: 52.07,30.75
S$703  (via drill 1 pad 1.93)
  other vias: 52.07,28.21
S$704  (via drill 1 pad 1.93)
  other vias: 49.53,28.21
S$705  (via drill 1 pad 1.93)
  other vias: 46.99,28.21
S$706  (via drill 1 pad 1.93)
  Top 0.61: v46.99,25.67 v46.99,15.51
S$707  (via drill 1 pad 1.93)
  other vias: 46.99,23.13
S$708  (via drill 1 pad 1.93)
  other vias: 46.99,20.59
S$709  (via drill 1 pad 1.93)
  other vias: 46.99,18.05
S$711  (via drill 1 pad 1.93)
  other vias: 46.99,12.97
S$712  (via drill 1 pad 1.93)
  other vias: 49.53,12.97
S$713  (via drill 1 pad 1.93)
  other vias: 52.07,12.97
S$714  (via drill 1 pad 1.93)
  other vias: 52.07,84.09
S$715  (via drill 1 pad 1.93)
  other vias: 49.53,84.09
S$716  (via drill 1 pad 1.93)
  other vias: 46.99,84.09
S$717  (via drill 1 pad 1.93)
  other vias: 124.46,15.51
S$718  (via drill 1 pad 1.93)
  other vias: 121.92,15.51
S$719  (via drill 1 pad 1.93)
  other vias: 121.92,12.97
S$720  (via drill 1 pad 1.93)
  Top 0.61: v46.99,7.89 v46.99,2.81
S$721  (via drill 1 pad 1.93)
  other vias: 46.99,5.35
S$722  (via drill 1 pad 1.93)
  other vias: 49.53,79.01
S$723  (via drill 1 pad 1.93)
  other vias: 49.53,76.47
S$724  (via drill 1 pad 1.93)
  other vias: 49.53,73.93
S$726  (via drill 1 pad 1.93)
  other vias: 49.53,68.85
S$727  (via drill 1 pad 1.93)
  other vias: 49.53,61.23
S$728  (via drill 1 pad 1.93)
  other vias: 49.53,58.69
S$729  (via drill 1 pad 1.93)
  other vias: 49.53,56.15
S$731  (via drill 1 pad 1.93)
  other vias: 49.53,51.07
S$732  (via drill 1 pad 1.93)
  Top 0.61: v49.53,43.45 v49.53,33.29
S$733  (via drill 1 pad 1.93)
  other vias: 49.53,40.91
S$734  (via drill 1 pad 1.93)
  other vias: 49.53,38.37
S$735  (via drill 1 pad 1.93)
  other vias: 49.53,35.83
S$737  (via drill 1 pad 1.93)
  Top 0.61: v49.53,25.67 v49.53,15.51
S$738  (via drill 1 pad 1.93)
  other vias: 49.53,23.13
S$739  (via drill 1 pad 1.93)
  other vias: 49.53,20.59
S$740  (via drill 1 pad 1.93)
  other vias: 49.53,18.05
S$743  (via drill 1 pad 1.93)
  other vias: 124.46,12.97
S$745  (via drill 1 pad 1.93)
  Top 0.61: v49.53,7.89 v49.53,2.81
S$746  (via drill 1 pad 1.93)
  other vias: 49.53,5.35
S$749  (via drill 1 pad 1.93)
  Top 0.61: v46.99,81.55 v46.99,71.39
S$750  (via drill 1 pad 1.93)
  Top 0.61: v49.53,81.55 v49.53,71.39
S$751  (via drill 1 pad 1.93)
  Top 0.61: v52.07,81.55 v52.07,71.39
S$753  (via drill 1 pad 1.93)
  other vias: 49.53,91.71
S$754  (via drill 1 pad 1.93)
  Top 0.61: v49.53,94.25 v49.53,89.17
S$755  (via drill 1 pad 1.93)
  Top 0.61: v52.07,94.25 v52.07,89.17
S$756  (via drill 1 pad 1.93)
  other vias: 52.07,91.71
S$758  (via drill 1 pad 1.93)
  other vias: 52.07,79.01
S$759  (via drill 1 pad 1.93)
  other vias: 52.07,76.47
S$760  (via drill 1 pad 1.93)
  other vias: 52.07,73.93
S$762  (via drill 1 pad 1.93)
  other vias: 52.07,68.85
S$763  (via drill 1 pad 1.93)
  other vias: 52.07,61.23
S$764  (via drill 1 pad 1.93)
  other vias: 52.07,58.69
S$765  (via drill 1 pad 1.93)
  other vias: 52.07,56.15
S$767  (via drill 1 pad 1.93)
  other vias: 52.07,51.07
S$768  (via drill 1 pad 1.93)
  Top 0.61: v52.07,43.45 v52.07,33.29
S$769  (via drill 1 pad 1.93)
  other vias: 52.07,40.91
S$770  (via drill 1 pad 1.93)
  other vias: 52.07,38.37
S$771  (via drill 1 pad 1.93)
  other vias: 52.07,35.83
S$773  (via drill 1 pad 1.93)
  Top 0.61: v52.07,25.67 v52.07,15.51
S$774  (via drill 1 pad 1.93)
  other vias: 52.07,23.13
S$775  (via drill 1 pad 1.93)
  other vias: 52.07,20.59
S$776  (via drill 1 pad 1.93)
  other vias: 52.07,18.05
S$781  (via drill 1 pad 1.93)
  Top 0.61: v52.07,7.89 v52.07,2.81
S$782  (via drill 1 pad 1.93)
  other vias: 52.07,5.35
S$784  (via drill 1 pad 1.93)
  Top 0.61: v54.61,94.25 v54.61,89.17
S$785  (via drill 1 pad 1.93)
  other vias: 54.61,91.71
S$787  (via drill 1 pad 1.93)
  other vias: 54.61,79.01
S$788  (via drill 1 pad 1.93)
  other vias: 54.61,76.47
S$789  (via drill 1 pad 1.93)
  other vias: 54.61,73.93
S$791  (via drill 1 pad 1.93)
  other vias: 54.61,68.85
S$792  (via drill 1 pad 1.93)
  other vias: 54.61,66.31
S$793  (via drill 1 pad 1.93)
  other vias: 57.15,66.31
S$794  (via drill 1 pad 1.93)
  other vias: 59.69,66.31
S$795  (via drill 1 pad 1.93)
  Top 0.61: v59.69,63.77 v59.69,53.61
S$796  (via drill 1 pad 1.93)
  Top 0.61: v57.15,63.77 v57.15,53.61
S$797  (via drill 1 pad 1.93)
  Top 0.61: v54.61,63.77 v54.61,53.61
S$798  (via drill 1 pad 1.93)
  other vias: 54.61,61.23
S$799  (via drill 1 pad 1.93)
  other vias: 54.61,58.69
S$800  (via drill 1 pad 1.93)
  other vias: 54.61,56.15
S$802  (via drill 1 pad 1.93)
  other vias: 54.61,51.07
S$804  (via drill 1 pad 1.93)
  other vias: 121.92,10.43
S$805  (via drill 1 pad 1.93)
  other vias: 124.46,10.43
S$806  (via drill 1 pad 1.93)
  other vias: 59.69,45.99
S$807  (via drill 1 pad 1.93)
  other vias: 57.15,45.99
S$808  (via drill 1 pad 1.93)
  other vias: 54.61,45.99
S$809  (via drill 1 pad 1.93)
  Top 0.61: v54.61,43.45 v54.61,33.29
S$810  (via drill 1 pad 1.93)
  other vias: 54.61,40.91
S$811  (via drill 1 pad 1.93)
  other vias: 54.61,38.37
S$812  (via drill 1 pad 1.93)
  other vias: 54.61,35.83
S$814  (via drill 1 pad 1.93)
  other vias: 54.61,30.75
S$815  (via drill 1 pad 1.93)
  other vias: 57.15,30.75
S$816  (via drill 1 pad 1.93)
  other vias: 59.69,30.75
S$817  (via drill 1 pad 1.93)
  other vias: 59.69,28.21
S$818  (via drill 1 pad 1.93)
  other vias: 57.15,28.21
S$819  (via drill 1 pad 1.93)
  other vias: 54.61,28.21
S$820  (via drill 1 pad 1.93)
  Top 0.61: v54.61,25.67 v54.61,15.51
S$821  (via drill 1 pad 1.93)
  other vias: 54.61,23.13
S$822  (via drill 1 pad 1.93)
  other vias: 54.61,20.59
S$823  (via drill 1 pad 1.93)
  other vias: 54.61,18.05
S$825  (via drill 1 pad 1.93)
  other vias: 54.61,12.97
S$826  (via drill 1 pad 1.93)
  other vias: 57.15,12.97
S$827  (via drill 1 pad 1.93)
  other vias: 59.69,12.97
S$828  (via drill 1 pad 1.93)
  other vias: 59.69,84.09
S$829  (via drill 1 pad 1.93)
  other vias: 57.15,84.09
S$830  (via drill 1 pad 1.93)
  other vias: 54.61,84.09
S$834  (via drill 1 pad 1.93)
  Top 0.61: v54.61,7.89 v54.61,2.81
S$835  (via drill 1 pad 1.93)
  other vias: 54.61,5.35
S$836  (via drill 1 pad 1.93)
  other vias: 57.15,79.01
S$837  (via drill 1 pad 1.93)
  other vias: 57.15,76.47
S$838  (via drill 1 pad 1.93)
  other vias: 57.15,73.93
S$840  (via drill 1 pad 1.93)
  other vias: 57.15,68.85
S$841  (via drill 1 pad 1.93)
  other vias: 57.15,61.23
S$842  (via drill 1 pad 1.93)
  other vias: 57.15,58.69
S$843  (via drill 1 pad 1.93)
  other vias: 57.15,56.15
S$845  (via drill 1 pad 1.93)
  other vias: 57.15,51.07
S$846  (via drill 1 pad 1.93)
  Top 0.61: v57.15,43.45 v57.15,33.29
S$847  (via drill 1 pad 1.93)
  other vias: 57.15,40.91
S$848  (via drill 1 pad 1.93)
  other vias: 57.15,38.37
S$849  (via drill 1 pad 1.93)
  other vias: 57.15,35.83
S$851  (via drill 1 pad 1.93)
  Top 0.61: v57.15,25.67 v57.15,15.51
S$852  (via drill 1 pad 1.93)
  other vias: 57.15,23.13
S$853  (via drill 1 pad 1.93)
  other vias: 57.15,20.59
S$854  (via drill 1 pad 1.93)
  other vias: 57.15,18.05
S$859  (via drill 1 pad 1.93)
  Top 0.61: v57.15,7.89 v57.15,2.81
S$860  (via drill 1 pad 1.93)
  other vias: 57.15,5.35
S$863  (via drill 1 pad 1.93)
  Top 0.61: v54.61,81.55 v54.61,71.39
S$864  (via drill 1 pad 1.93)
  Top 0.61: v57.15,81.55 v57.15,71.39
S$865  (via drill 1 pad 1.93)
  Top 0.61: v59.69,81.55 v59.69,71.39
S$867  (via drill 1 pad 1.93)
  other vias: 57.15,91.71
S$868  (via drill 1 pad 1.93)
  Top 0.61: v57.15,94.25 v57.15,89.17
S$869  (via drill 1 pad 1.93)
  Top 0.61: v59.69,94.25 v59.69,89.17
S$870  (via drill 1 pad 1.93)
  other vias: 59.69,91.71
S$872  (via drill 1 pad 1.93)
  other vias: 59.69,79.01
S$873  (via drill 1 pad 1.93)
  other vias: 59.69,76.47
S$874  (via drill 1 pad 1.93)
  other vias: 59.69,73.93
S$876  (via drill 1 pad 1.93)
  other vias: 59.69,68.85
S$877  (via drill 1 pad 1.93)
  other vias: 59.69,61.23
S$878  (via drill 1 pad 1.93)
  other vias: 59.69,58.69
S$879  (via drill 1 pad 1.93)
  other vias: 59.69,56.15
S$881  (via drill 1 pad 1.93)
  other vias: 59.69,51.07
S$882  (via drill 1 pad 1.93)
  Top 0.61: v59.69,43.45 v59.69,33.29
S$883  (via drill 1 pad 1.93)
  other vias: 59.69,40.91
S$884  (via drill 1 pad 1.93)
  other vias: 59.69,38.37
S$885  (via drill 1 pad 1.93)
  other vias: 59.69,35.83
S$887  (via drill 1 pad 1.93)
  Top 0.61: v59.69,25.67 v59.69,15.51
S$888  (via drill 1 pad 1.93)
  other vias: 59.69,23.13
S$889  (via drill 1 pad 1.93)
  other vias: 59.69,20.59
S$890  (via drill 1 pad 1.93)
  other vias: 59.69,18.05
S$895  (via drill 1 pad 1.93)
  Top 0.61: v59.69,7.89 v59.69,2.81
S$896  (via drill 1 pad 1.93)
  other vias: 59.69,5.35
S$898  (via drill 1 pad 1.93)
  Top 0.61: v62.23,94.25 v62.23,89.17
S$899  (via drill 1 pad 1.93)
  other vias: 62.23,91.71
S$901  (via drill 1 pad 1.93)
  other vias: 62.23,79.01
S$902  (via drill 1 pad 1.93)
  other vias: 62.23,76.47
S$903  (via drill 1 pad 1.93)
  other vias: 62.23,73.93
S$905  (via drill 1 pad 1.93)
  other vias: 62.23,68.85
S$906  (via drill 1 pad 1.93)
  other vias: 62.23,66.31
S$907  (via drill 1 pad 1.93)
  other vias: 64.77,66.31
S$908  (via drill 1 pad 1.93)
  other vias: 67.31,66.31
S$909  (via drill 1 pad 1.93)
  Top 0.61: v67.31,63.77 v67.31,53.61
S$910  (via drill 1 pad 1.93)
  Top 0.61: v64.77,63.77 v64.77,53.61
S$911  (via drill 1 pad 1.93)
  Top 0.61: v62.23,63.77 v62.23,53.61
S$912  (via drill 1 pad 1.93)
  other vias: 62.23,61.23
S$913  (via drill 1 pad 1.93)
  other vias: 62.23,58.69
S$914  (via drill 1 pad 1.93)
  other vias: 62.23,56.15
S$916  (via drill 1 pad 1.93)
  other vias: 62.23,51.07
S$920  (via drill 1 pad 1.93)
  other vias: 67.31,45.99
S$921  (via drill 1 pad 1.93)
  other vias: 64.77,45.99
S$922  (via drill 1 pad 1.93)
  other vias: 62.23,45.99
S$923  (via drill 1 pad 1.93)
  Top 0.61: v62.23,43.45 v62.23,33.29
S$924  (via drill 1 pad 1.93)
  other vias: 62.23,40.91
S$925  (via drill 1 pad 1.93)
  other vias: 62.23,38.37
S$926  (via drill 1 pad 1.93)
  other vias: 62.23,35.83
S$928  (via drill 1 pad 1.93)
  other vias: 62.23,30.75
S$929  (via drill 1 pad 1.93)
  other vias: 64.77,30.75
S$930  (via drill 1 pad 1.93)
  other vias: 67.31,30.75
S$931  (via drill 1 pad 1.93)
  other vias: 67.31,28.21
S$932  (via drill 1 pad 1.93)
  other vias: 64.77,28.21
S$933  (via drill 1 pad 1.93)
  other vias: 62.23,28.21
S$934  (via drill 1 pad 1.93)
  Top 0.61: v62.23,25.67 v62.23,15.51
S$935  (via drill 1 pad 1.93)
  other vias: 62.23,23.13
S$936  (via drill 1 pad 1.93)
  other vias: 62.23,20.59
S$937  (via drill 1 pad 1.93)
  other vias: 62.23,18.05
S$939  (via drill 1 pad 1.93)
  other vias: 62.23,12.97
S$940  (via drill 1 pad 1.93)
  other vias: 64.77,12.97
S$941  (via drill 1 pad 1.93)
  other vias: 67.31,12.97
S$942  (via drill 1 pad 1.93)
  other vias: 67.31,84.09
S$943  (via drill 1 pad 1.93)
  other vias: 64.77,84.09
S$944  (via drill 1 pad 1.93)
  other vias: 62.23,84.09
S$948  (via drill 1 pad 1.93)
  Top 0.61: v62.23,7.89 v62.23,2.81
S$949  (via drill 1 pad 1.93)
  other vias: 62.23,5.35
S$950  (via drill 1 pad 1.93)
  other vias: 64.77,79.01
S$951  (via drill 1 pad 1.93)
  other vias: 64.77,76.47
S$952  (via drill 1 pad 1.93)
  other vias: 64.77,73.93
S$954  (via drill 1 pad 1.93)
  other vias: 64.77,68.85
S$955  (via drill 1 pad 1.93)
  other vias: 64.77,61.23
S$956  (via drill 1 pad 1.93)
  other vias: 64.77,58.69
S$957  (via drill 1 pad 1.93)
  other vias: 64.77,56.15
S$959  (via drill 1 pad 1.93)
  other vias: 64.77,51.07
S$960  (via drill 1 pad 1.93)
  Top 0.61: v64.77,43.45 v64.77,33.29
S$961  (via drill 1 pad 1.93)
  other vias: 64.77,40.91
S$962  (via drill 1 pad 1.93)
  other vias: 64.77,38.37
S$963  (via drill 1 pad 1.93)
  other vias: 64.77,35.83
S$965  (via drill 1 pad 1.93)
  Top 0.61: v64.77,25.67 v64.77,15.51
S$966  (via drill 1 pad 1.93)
  other vias: 64.77,23.13
S$967  (via drill 1 pad 1.93)
  other vias: 64.77,20.59
S$968  (via drill 1 pad 1.93)
  other vias: 64.77,18.05
S$973  (via drill 1 pad 1.93)
  Top 0.61: v64.77,7.89 v64.77,2.81
S$974  (via drill 1 pad 1.93)
  other vias: 64.77,5.35
S$977  (via drill 1 pad 1.93)
  Top 0.61: v62.23,81.55 v62.23,71.39
S$978  (via drill 1 pad 1.93)
  Top 0.61: v64.77,81.55 v64.77,71.39
S$979  (via drill 1 pad 1.93)
  Top 0.61: v67.31,81.55 v67.31,71.39
S$981  (via drill 1 pad 1.93)
  other vias: 64.77,91.71
S$982  (via drill 1 pad 1.93)
  Top 0.61: v64.77,94.25 v64.77,89.17
S$983  (via drill 1 pad 1.93)
  Top 0.61: v67.31,94.25 v67.31,89.17
S$984  (via drill 1 pad 1.93)
  other vias: 67.31,91.71
S$986  (via drill 1 pad 1.93)
  other vias: 67.31,79.01
S$987  (via drill 1 pad 1.93)
  other vias: 67.31,76.47
S$988  (via drill 1 pad 1.93)
  other vias: 67.31,73.93
S$990  (via drill 1 pad 1.93)
  other vias: 67.31,68.85
S$991  (via drill 1 pad 1.93)
  other vias: 67.31,61.23
S$992  (via drill 1 pad 1.93)
  other vias: 67.31,58.69
S$993  (via drill 1 pad 1.93)
  other vias: 67.31,56.15
S$995  (via drill 1 pad 1.93)
  other vias: 67.31,51.07
S$996  (via drill 1 pad 1.93)
  Top 0.61: v67.31,43.45 v67.31,33.29
S$997  (via drill 1 pad 1.93)
  other vias: 67.31,40.91
S$998  (via drill 1 pad 1.93)
  other vias: 67.31,38.37
S$999  (via drill 1 pad 1.93)
  other vias: 67.31,35.83
S$1001  (via drill 1 pad 1.93)
  Top 0.61: v67.31,25.67 v67.31,15.51
S$1002  (via drill 1 pad 1.93)
  other vias: 67.31,23.13
S$1003  (via drill 1 pad 1.93)
  other vias: 67.31,20.59
S$1004  (via drill 1 pad 1.93)
  other vias: 67.31,18.05
S$1009  (via drill 1 pad 1.93)
  Top 0.61: v67.31,7.89 v67.31,2.81
S$1010  (via drill 1 pad 1.93)
  other vias: 67.31,5.35
S$1012  (via drill 1 pad 1.93)
  Top 0.61: v69.85,94.25 v69.85,89.17
S$1013  (via drill 1 pad 1.93)
  other vias: 69.85,91.71
S$1015  (via drill 1 pad 1.93)
  other vias: 69.85,79.01
S$1016  (via drill 1 pad 1.93)
  other vias: 69.85,76.47
S$1017  (via drill 1 pad 1.93)
  other vias: 69.85,73.93
S$1019  (via drill 1 pad 1.93)
  other vias: 69.85,68.85
S$1020  (via drill 1 pad 1.93)
  other vias: 69.85,66.31
S$1021  (via drill 1 pad 1.93)
  other vias: 72.39,66.31
S$1022  (via drill 1 pad 1.93)
  other vias: 74.93,66.31
S$1023  (via drill 1 pad 1.93)
  Top 0.61: v74.93,63.77 v74.93,53.61
S$1024  (via drill 1 pad 1.93)
  Top 0.61: v72.39,63.77 v72.39,53.61